# Altium PCB PCB_NanoDevKit.PcbDoc
Units mil, origin at the board's own origin, x right, y up, seen from the top; angles counter-clockwise.
Board outline 1668.62 x 2995 mil, 2 copper layers (Top Layer, Bottom Layer); 71 components, 81 nets, 304 pads, 261 vias.
Unrouted connection lines stored in the file: 6.
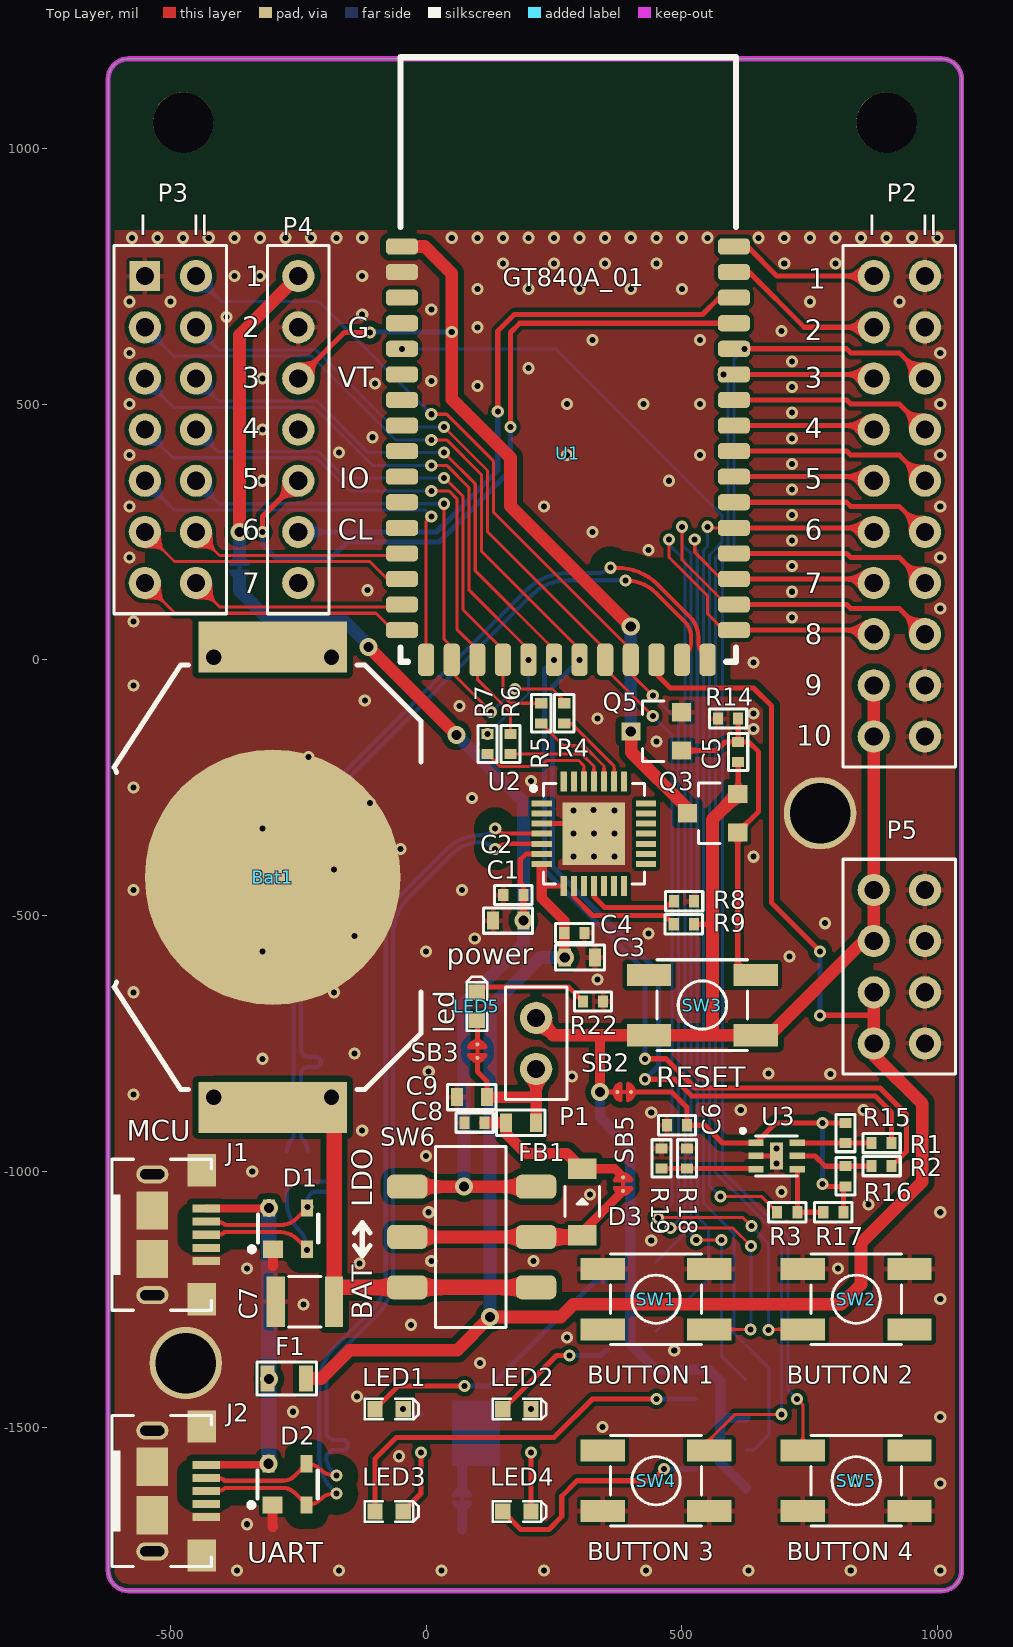
[diagram p0: Top Layer view]
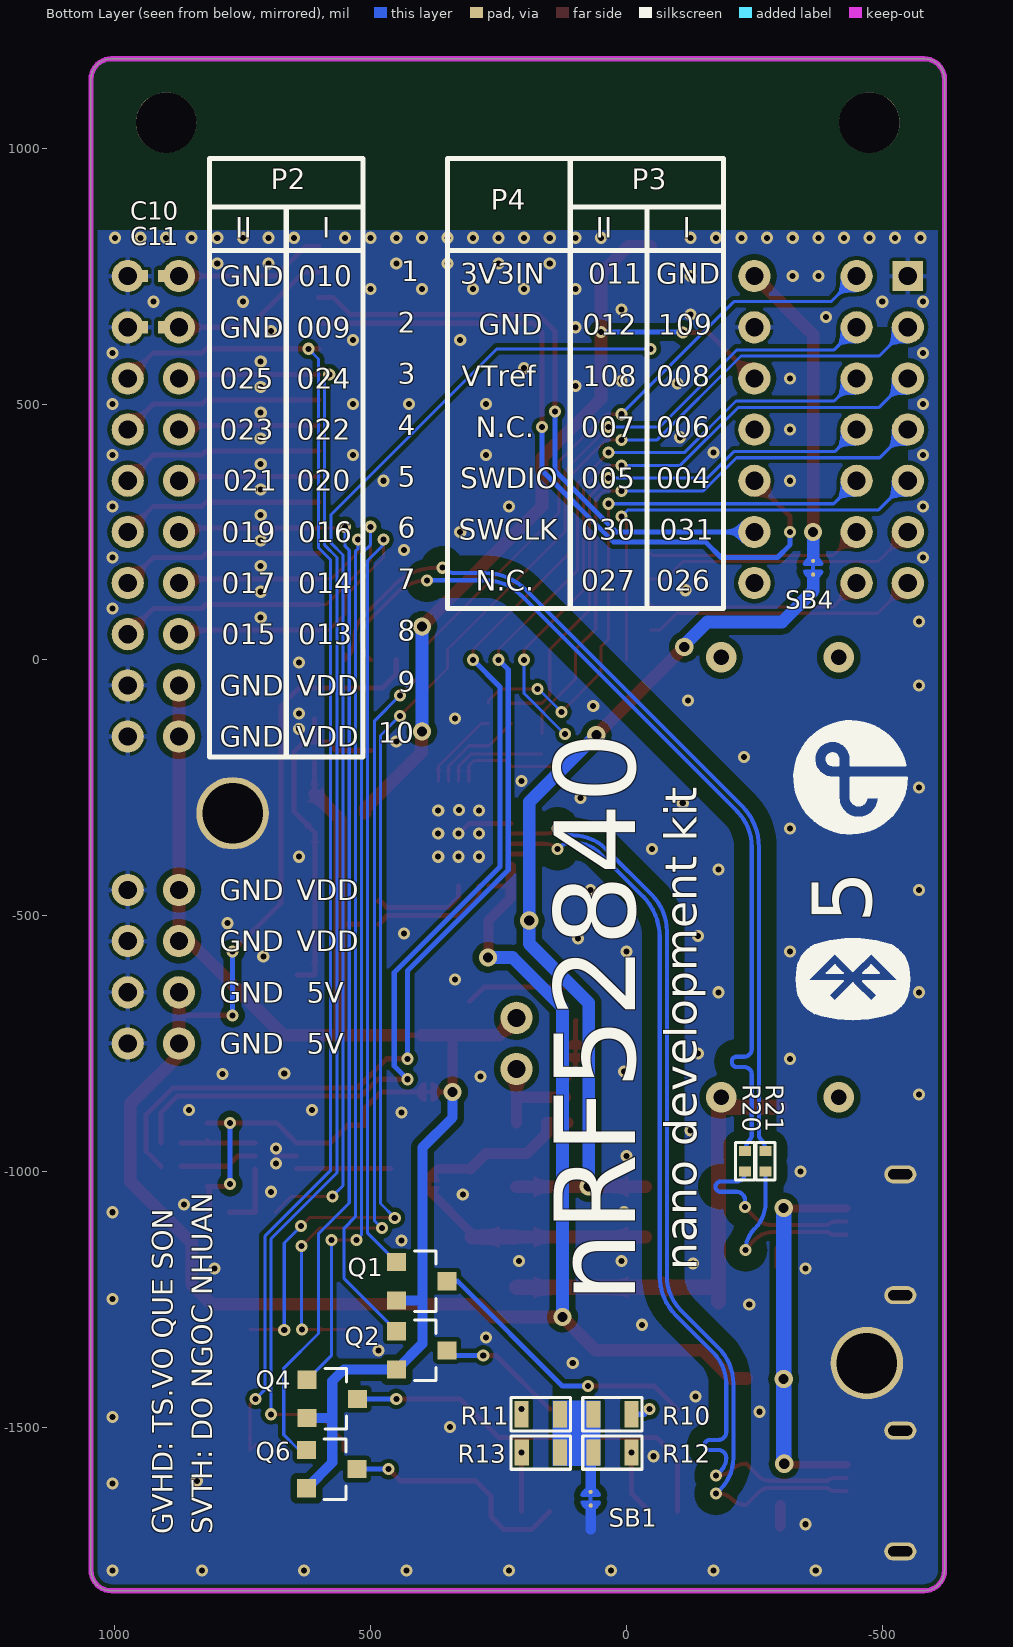
[diagram p1: Bottom Layer view, seen from below]

## Layer stack, top to bottom
Top Solder: solder mask 0.4, Solder Resist, Dk 3.5
Top Layer: signal copper 1.4
Dielectric 1: dielectric 12.6, FR-4, Dk 4.8
Bottom Layer: signal copper 1.4
Bottom Solder: solder mask 0.4, Solder Resist, Dk 3.5

## Board outline
-621.81,-1780 ccw(c-581.81,-1780) -581.81,-1820 1006.81,-1820 ccw(c1006.81,-1780) 1046.81,-1780 1046.81,1135 ccw(c1006.81,1135) 1006.81,1175 -581.81,1175 ccw(c-581.81,1135) -621.81,1135

## Design rules (kind name [scope] priority, off if disabled: settings)
Clearance SB_Clearance [HasFootprint('Solderbridge_Shorted')] p1: gap=6 ignorepadtopadclearanceinfootprint=FALSE except(12: Arc-Fill Arc-Poly Arc-Region Track-Fill Track-Poly Track-Region SMDPad-Fill SMDPad-Poly SMDPad-Region THPad-Fill THPad-Poly THPad-Region Via-Fill Via-Poly Via-Region Fill-Fill Fill-Poly Fill-Region Poly-Poly Poly-Region Region-Region)
Clearance Power [InNet('VBUS') or InNet('VBUS''') or InNet('VDD_nRF') or InNet('VTref') or InNet('VDD_SS') or InNet('VDD_SYS') or InNet('VDD_SYS''') or InNet('BAT_VDD') or InNet('LDO_VDD')  or InNet('NetC8_2') or InNet('3V3IN') vs InNet('GND')] p2: gap=10 ignorepadtopadclearanceinfootprint=FALSE except(12: Arc-Fill Arc-Poly Arc-Region Track-Fill Track-Poly Track-Region SMDPad-Fill SMDPad-Poly SMDPad-Region THPad-Fill THPad-Poly THPad-Region Via-Fill Via-Poly Via-Region Fill-Fill Fill-Poly Fill-Region Poly-Poly Poly-Region Region-Region)
Clearance "Stitching VDD_nRF" [IsStitchingVia and InNet('VDD_nRF') vs (IsVia and (Not IsStitchingVia)) Or IsPad] p3: gap=5 ignorepadtopadclearanceinfootprint=FALSE
Clearance USB_Clearance [(InDifferentialPairClass('All Differential Pairs'))] p4: gap=6 ignorepadtopadclearanceinfootprint=FALSE except(30: Arc-Fill Arc-Poly Arc-Region Track-Fill Track-Poly Track-Region SMDPad-Fill SMDPad-Poly SMDPad-Region THPad-Fill THPad-Poly THPad-Region Via-Fill Via-Poly Via-Region Fill-Fill Fill-Poly Fill-Region Poly-Poly Poly-Region Region-Region)
Clearance [All] p5: gap=6 ignorepadtopadclearanceinfootprint=FALSE except(8: Arc-Fill Arc-Poly Arc-Region Track-Fill Track-Poly Track-Region SMDPad-Fill SMDPad-Poly SMDPad-Region THPad-Fill THPad-Poly THPad-Region Via-Fill Via-Poly Via-Region Fill-Fill Fill-Poly Fill-Region Poly-Poly Poly-Region Region-Region)
DiffPairsRouting [All] p1: maxlimit=6 minlimit=6 mostfreqgap=6 toplayer_minwidth=8 toplayer_maxwidth=8 toplayer_prefwidth=8 bottomlayer_minwidth=8 bottomlayer_maxwidth=8 bottomlayer_prefwidth=8 maxuncoupledlength=500
PolygonConnect PolygonConnect_1 [HasFootprint('CR2032_HOLDER')     or HasFootprint('QFN28-CP2102')       or HasFootprint('nRF52840_GT840A01')         or HasFootprint('USB-Micro-B-RA-SMD-PiP') or HasPad('Free-1')] p1: connectstyle=Direct reliefconductorwidth=10 reliefentries=4 polygonreliefangle="90 Angle" airgapwidth=10
PolygonConnect PolygonConnect_Via [isVia and InNet('GND')] p2: connectstyle=Direct reliefconductorwidth=10 reliefentries=4 polygonreliefangle="90 Angle" airgapwidth=10
PolygonConnect [All] p3: connectstyle=Relief reliefconductorwidth=10 reliefentries=4 polygonreliefangle="90 Angle" airgapwidth=6
RoutingVias [All] p1: holewidth=15.75 width=27.56 viastyle="Through Hole" minholewidth=11.81 minwidth=23.62 maxholewidth=39.37 maxwidth=78.74
SolderMaskExpansion [All] p1: expansion=4
Width [All] p1: maxlimit=100 minlimit=6 preferedwidth=10
29 further rules are at their usual default settings.

## Classes and differential pairs
component class Sheet2_nRF52840_module: R1 R2 R3 U1
component class Sheet3_CP2102: C1 C2 C3 C4 R4 R5 R6 R7 R8 R9 U2
component class Sheet4_misc: C5 C6 LED1 LED2 LED3 LED4 Q1 Q2 Q3 Q4 Q5 Q6 R10 R11 R12 R13 R14 R15 R16 R17 R18 R19 SB1 SB2 SW1 SW2 SW3 SW4 SW5 U3
component class Sheet5_PowerSupply&Connecters: Bat1 C7 C8 C9 C10 C11 D1 D2 D3 F1 FB1 J1 J2 LED5 P1 P2 P3 P4 P5 R20 R21 R22 SB3 SB4 SB5 SW6
differential pair D1: +D1_P -D1_N
differential pair D2: +D2_P -D2_N
differential pair D3: +D3_P -D3_N

## Components (designator, comment, footprint, x,y, rotation, side; value= is the part's Value field where it differs from the comment)
Bat1 "Bat Holder CR2032" CR2032_HOLDER -300,-425 r270 top locked
C1 "4.7µF" 0603_Imperial 130.94,-510 r0 top
C2 "100nF" "0402 imperial" 150.63,-460 r0 top
C3 "1µF" 0603_Imperial 330.02,-582 r180 top
C4 "100nF" "0402 imperial" 309.35,-534 r180 top
C5 "47nF" "0402 imperial" 610,-160.63 r270 top
C6 "47nF" "0402 imperial" 470.63,-910 r0 top
C7 "100µF" 1210_Imperial -294.17,-1255 r0 top
C8 "100nF" "0402 imperial" 75,-905 r0 top
C9 "1µF" 0603_Imperial 60,-855 r0 top
C10 "Ctuning" "0402 imperial" 905.63,750 r0 bottom
C11 "Ctuning" "0402 imperial" 945,650 r180 bottom
D1 "PRTR5V0U2X" SOT190P230X110-4L -270,-1112 r90 top
D2 "PRTR5V0U2X" SOT190P230X110-4L -271,-1612 r90 top
D3 "DIODE S4" SOD-123 305,-995.08 r270 top
F1 "0.5A 6V" 0805_Imperial -310,-1405 r0 top
FB1 "470R/3A" 0603_Imperial 155.94,-905 r0 top
J1 "MicroUSB-B" USB-Micro-B-RA-SMD-PiP -430,-1124 r0 top
J2 "MicroUSB-B" USB-Micro-B-RA-SMD-PiP -430,-1625 r0 top
LED1 "Red" LED_0603 -45,-1465 r180 top
LED2 "Green" LED_0603 205,-1465 r180 top
LED3 "Yellow" LED_0603 -45,-1665 r180 top
LED4 "Blue" LED_0603 205,-1665 r180 top
LED5 "Power" LED_0603 99,-650 r270 top
P1 "2p, 2.54mm" CONN2.54MM2P 215,-800 r90 top
P2 "10x2, 2.54mm" CONN2.54MM10X2 875,750 r270 top locked
P3 "2x7p, 2.54mm" CONN2.54MM7PX2 -550,750 r270 top
P4 "Debug&Programming" CONN2.54MM7P -250,750 r270 top
P5 "2x4p, 2.54mm" CONN2.54MM2X4 875,-450 r270 top
Q1 "Si2301DS" SOT-23 400,-1215 r270 bottom
Q2 "Si2301DS" SOT-23 400,-1350 r270 bottom
Q3 "Si2301DS" SOT-23 560,-300 r90 top
Q4 "Si2301DS" SOT-23 575,-1445 r270 bottom
Q5 "Si2300" SOT-23 450,-140 r90 top
Q6 "Si2301DS" SOT-23 576.02,-1582.19 r270 bottom
R1 "0R" "0402 imperial" 910,-945 r180 top
R2 "0R" "0402 imperial" 910,-990 r180 top
R3 "0R" "0402 imperial" 686.26,-1080 r0 top
R4 "0R" "0402 imperial" 270,-85 r270 top
R5 "0R" "0402 imperial" 225,-85 r270 top
R6 "0R" "0402 imperial" 165,-145 r270 top
R7 "0R" "0402 imperial" 120,-145 r270 top
R8 "10K" "0402 imperial" 484.63,-472 r0 top
R9 "4.7K" "0402 imperial" 484,-517 r0 top
R10 "680R" 0805_Imperial -10,-1475 r0 bottom
R11 "10K" 0805_Imperial 205,-1475 r180 bottom
R12 "1K" 0805_Imperial -10,-1550 r0 bottom
R13 "1K" 0805_Imperial 204.8,-1550 r180 bottom
R14 "100K" "0402 imperial" 570.63,-115 r0 top
R15 "4K7" "0402 imperial" 820,-945 r90 top
R16 "4K7" "0402 imperial" 820,-990 r270 top
R17 "1M" "0402 imperial" 776.26,-1080 r0 top
R18 "1M" "0402 imperial" 510,-955 r270 top
R19 "1M" "0402 imperial" 460,-955 r270 top
R20 "0R" "0402 imperial" -232,-1000 r90 bottom
R21 "0R" "0402 imperial" -272,-1000 r90 bottom
R22 "15K" "0402 imperial" 346,-668 r180 top
SB1 "Solderbridge" Solderbridge_Shorted 70,-1640 r270 bottom net-tie
SB2 "Solderbridge" Solderbridge_Shorted 387,-845 r0 top net-tie
SB3 "Solderbridge" Solderbridge_Shorted 100,-765 r90 top net-tie
SB4 "Solderbridge" Solderbridge_Shorted -365,180 r90 bottom net-tie
SB5 "Solderbridge" Solderbridge_Shorted 385,-1025 r270 top net-tie
SW1 "BUTTON 1" Switch-PB-4.5x4.5mm-SMD 449.33,-1250 r180 top
SW2 "BUTTON 2" Switch-PB-4.5x4.5mm-SMD 840.67,-1250 r180 top
SW3 "RESET" Switch-PB-4.5x4.5mm-SMD 540,-675 r0 top
SW4 "BUTTON 3" Switch-PB-4.5x4.5mm-SMD 449.33,-1605 r0 top
SW5 "BUTTON 4" Switch-PB-4.5x4.5mm-SMD 840.67,-1605 r0 top
SW6 "MSS22D18" MSS22D18SMD 215,-1030 r90 top locked
U1 "nRF52840 module" nRF52840_GT840A01 0,0 r0 top locked
U2 "CP2102" QFN28-CP2102 328.03,-340 r0 top locked
U3 "Light Sensor" SON65P200X210X80-7N 685,-970 r0 top locked

## Footprints (in the part's own frame and the unit in brackets; to place one, negate y for a bottom-side part, rotate by r counter-clockwise, add the part's x,y. Pads: shape width x height; smd on the part's side, far side on the other; paste and mask are expansions set on the pad)
"0402 imperial" [mm] "R, L, C"
  rect 0.5x0.6 smd: 1(0,0) 2(1,0)
  silkscreen extent -0.43,-0.48 1.43,0.48, body extent 0,-0.25 1,0.25, height 0.35
0603_Imperial [mm]
  rect 0.6x0.9 smd: 1(0,0) 2(1.5,0)
  silkscreen extent -0.48,-0.63 1.95,0.63, body extent -0.02,-0.42 1.53,0.43, height 0.35
0805_Imperial [mm]
  rect 0.7x1.3 smd: 1(0,0) 2(1.9,0)
  silkscreen extent -0.53,-0.82 2.42,0.82, body extent -0.05,-0.6 1.95,0.6, height 0.45
1210_Imperial [mm]
  rect 0.9x2.5 smd: 1(0,0) 2(2.9,0)
  silkscreen extent 0.65,-1.25 2.25,1.25, body extent -0.15,-1.25 3.05,1.25, height 0.55
CONN2.54MM2P [mm]
  round 1.6 hole 0.9: 1(0,0) 2(2.54,0)
  silkscreen extent -1.52,-1.52 4.06,1.52, body extent -1.27,-1.27 3.81,1.27, height 8.5
CONN2.54MM2X4 [mm]
  round 1.6 hole 0.9: 1(0,0) 2(0,2.54) 3(2.54,0) 4(2.54,2.54) 5(5.08,0) 6(5.08,2.54) 7(7.62,0) 8(7.62,2.54)
  silkscreen extent -1.52,-1.52 9.14,4.06, body extent -1.27,-1.27 8.89,3.81, height 8.5
CONN2.54MM7P [mm]
  round 1.6 hole 0.9: 1(0,0) 2(2.54,0) 3(5.08,0) 4(7.62,0) 5(10.16,0) 6(12.7,0) 7(15.24,0)
  silkscreen extent -1.52,-1.52 16.76,1.52, body extent -1.27,-1.27 16.51,1.27, height 8.5
CONN2.54MM7PX2 [mm]
  rect 1.5x1.5 hole 0.9: 1(0,0)
  round 1.6 hole 0.9: 2(0,2.54) 3(2.54,0) 4(2.54,2.54) 5(5.08,0) 6(5.08,2.54) 7(7.62,0) 8(7.62,2.54) 9(10.16,0) 10(10.16,2.54) 11(12.7,0) 12(12.7,2.54) 13(15.24,0) 14(15.24,2.54)
  silkscreen extent -1.52,-1.52 16.76,4.06, body extent -1.27,-1.27 16.51,3.81, height 8.5
CONN2.54MM10X2 [mm]
  round 1.6 hole 0.9: 1(0,0) 2(0,2.54) 3(2.54,0) 4(2.54,2.54) 5(5.08,0) 6(5.08,2.54) 7(7.62,0) 8(7.62,2.54) 9(10.16,0) 10(10.16,2.54) 11(12.7,0) 12(12.7,2.54) 13(15.24,0) 14(15.24,2.54) 15(17.78,0) 16(17.78,2.54) 17(20.32,0) 18(20.32,2.54) 19(22.86,0) 20(22.86,2.54)
  silkscreen extent -1.52,-1.52 24.38,4.06, body extent -1.27,-1.27 24.13,3.81, height 8.5
CR2032_HOLDER [mil] "BK-912 @ tme"
  rect 100x290 smd: 1(-450,0) 1(450,0)
  round 500 smd: 2(0,0)
  silkscreen extent -415,-310 415,290, body extent -455,-310 455,290, height 170
LED_0603 [mil]
  rect 30x32 smd: 1(0,0) 2(55,0)
  silkscreen extent -30,-20 75,20, body extent -4,-16 60,16, height 24
MSS22D18SMD [mm]
  rrect50% 1.2x2 smd: 1(0,0) 2(-2.5,0) 3(-5,0) 4(0,6.4) 5(-2.5,6.4) 6(-5,6.4)
  silkscreen extent -7,1.5 2,5, body extent -6.75,0.1 1.75,6.35, height 3.5
nRF52840_GT840A01 [mm] "mechanical 31 tolerance 0.75mm"
  rrect50% 1.6x0.8 smd: 1(-1.203,20.522) 2(-1.203,19.252) 3(-1.203,17.982) 4(-1.203,16.712) 5(-1.203,15.442) 6(-1.203,14.172) 7(-1.203,12.902) 8(-1.203,11.632) 9(-1.203,10.362) 10(-1.203,9.092) 11(-1.203,7.822) 12(-1.203,6.552) 13(-1.203,5.282) 14(-1.203,4.012) 15(-1.203,2.742) 16(-1.203,1.472) 29(15.282,1.472) 30(15.282,2.742) 31(15.282,4.012) 32(15.282,5.282) 33(15.282,6.552) 34(15.282,7.822) 35(15.282,9.092) 36(15.282,10.362) 37(15.282,11.632) 38(15.282,12.902) 39(15.282,14.172) 40(15.282,15.442) 41(15.282,16.712) 42(15.282,17.982) 43(15.282,19.252) 44(15.282,20.522)
  rrect50% 0.8x1.6 smd: 17(0,0) 18(1.27,0) 19(2.54,0) 20(3.81,0) 21(5.08,0) 22(6.35,0) 23(7.62,0) 24(8.89,0) 25(10.16,0) 26(11.43,0) 27(12.7,0) 28(13.97,0)
  silkscreen extent -1.28,-0.1 15.38,29.92, body extent -1.28,-0.1 15.28,29.92, height 2
QFN28-CP2102 [mm] "Silicon Labs"
  rect 1x0.3 smd: 1(-2.59,1.5) 2(-2.59,1) 3(-2.59,0.5) 4(-2.59,0) 5(-2.59,-0.5) 6(-2.59,-1) 7(-2.59,-1.5) 15(2.59,-1.5) 16(2.59,-1) 17(2.59,-0.5) 18(2.59,0) 19(2.59,0.5) 20(2.59,1) 21(2.59,1.5)
  rect 0.3x1 smd: 8(-1.5,-2.59) 9(-1,-2.59) 10(-0.5,-2.59) 11(0,-2.59) 12(0.5,-2.59) 13(1,-2.59) 14(1.5,-2.59) 22(1.5,2.59) 23(1,2.59) 24(0.5,2.59) 25(0,2.59) 26(-0.5,2.59) 27(-1,2.59) 28(-1.5,2.59)
  rect 3.1x3.1 smd: 29(0,0)
  silkscreen extent -3.1,-2.5 2.5,2.5, body extent -2.5,-2.5 2.5,2.5, height 1
SOD-123 [mm]
  rect 1x1.4 smd: 1(0,0) 2(3.3,0)
  silkscreen extent 0.87,-0.85 2.37,0.85, body extent 0.23,-0.85 3.08,0.85, height 1.35
Solderbridge_Shorted [mm]
  round 0.2 smd paste-10: 1(-0.338,0) 2(0.338,0)
  Top Layer region: -0.102,-0.432 -0.178,-0.505 -0.296,-0.467 -0.361,-0.424 -0.434,-0.351 -0.488,-0.292 -0.546,-0.193 -0.574,-0.099 -0.569,0.122 -0.544,0.193 -0.46,0.33 -0.376,0.411 -0.284,0.469 -0.183,0.5 -0.132,0.483 -0.102,0.43
  Top Layer region: 0.102,0.432 0.178,0.505 0.296,0.467 0.361,0.424 0.434,0.351 0.488,0.292 0.546,0.193 0.574,0.099 0.569,-0.122 0.544,-0.193 0.46,-0.33 0.376,-0.411 0.284,-0.469 0.183,-0.5 0.132,-0.483 0.102,-0.43
  Top Layer lines w0.152: 0.178,0.431 cw(c0.068,0) 0.178,-0.431 ; -0.178,0.431 ccw(c-0.068,0) -0.178,-0.431
  Top Layer lines w0.203: 0.338,0 -0.338,0
SON65P200X210X80-7N [mm]
  rect 0.76x0.32 smd: 1(-1.02,0.65) 2(-1.02,0) 3(-1.02,-0.65) 4(1.02,-0.65) 5(1.02,0) 6(1.02,0.65)
  rect 0.65x1.35 smd: 7(0,0)
  silkscreen extent -1.77,-1 1.05,1.35, body extent -1.05,-1 1.05,1, height 0.75
SOT190P230X110-4L [mm]
  rect 0.85x1 smd: 1(-1.025,0.75)
  rect 0.85x0.6 smd: 2(-1.025,-0.95) 3(1.025,-0.95) 4(1.025,0.95)
  silkscreen extent -1.15,-1.5 0.7,1.92, body extent -1.21,-1.46 1.21,1.46, height 1
SOT-23 [mm] "1-G 2-S 3-D"
  rect 0.9x0.95 smd: 1(-0.95,-1.25) 2(0.95,-1.25) 3(0,1.25)
  silkscreen extent -1.51,-0.38 1.5,0.69, body extent -1.52,-1.23 1.48,1.27, height 1.06
Switch-PB-4.5x4.5mm-SMD [mm] "Tactile Switch, SPNO, SMD, 4.5x4.5x3.8mm"
  rect 2.2x1.1 smd: 1(-2.65,-1.5) 1(2.65,-1.5) 2(-2.65,1.5) 2(2.65,1.5)
  silkscreen extent -2.25,-2.25 2.25,2.25, body extent -2.25,-2.25 2.25,2.25, height 3.8
USB-Micro-B-RA-SMD-PiP [mm]
  rect 1.35x0.4 smd: 1(0,1.3) 2(0,0.65) 3(0,0) 4(0,-0.65) 5(0,-1.3)
  oval 1.6x0.9 hole 0.5 slot 1.2 at 0 deg: 6(-2.675,-3) 6(-2.675,3)
  rect 1.55x1.9 smd: 6(-2.675,-1.2) 6(-2.675,1.2)
  rect 1.4x1.6 smd: 6(-0.225,-3.2) 6(-0.225,3.2)
  silkscreen extent -4.75,-3.75 0.25,3.75, body extent -5.28,-4.1 0.15,4.1, height 2.72

## Part data
Bat1: "Bat Holder CR2032 SMD", Note="Bat Holder CR2032"
C1 C2 C3 C4 C5 C6 C7 C8 C9 C10 C11: library part Capacitor, "Genaral Schematic", Tolerance=±5%
D1 D2: "Ultra low capacitance double rail-to-rail ESD protection diode", 2nd source part number=152-4157, Manufacturer=NXP, Supplier part number=568-4140-1-ND, 2nd source Supplier=Farnell, Artikkelnr Noca=10069015, Artikkelnr Simpro=N.A., Datasheet=http://www.farnell.com/datasheets/109718.pdf, Footprint Doc=SOT-143B, LatestRevisionDate=2012-06-11, Manufacturer Part Number=PRTR5V0U2X, Part Number=PRTR5V0U2X, Published=2012-06-11, Publisher="Nordic Semiconductor", Supplier=Digi-Key
D3: library part "Diode Schottky", "Diode Schottky"
F1: library part Fuse, "Fuse Fuse Fuse"
FB1: library part "Ferrite Bead", "General FB"
J1 J2: "MicroUSB-B-SMT", 2nd source part number=609-4616-1-ND, Manufacturer="Allen Creations Corp.", Manufacturer Part Number=AJU55-BS2111-L, Part Number=USB-Micro-B-RA-SMD-PiP, Part number IPS=00000007790, 2nd source Supplier=Digi-Key, Artikkelnr Noca=55029020, Artikkelnr Simpro=N.A., Datasheet="\\hizz\pro\app9717\Datasheet\connectores\Allen Creations Corp\AJU-211.pdf", Footprint Doc=USB-Micro-B-RA-SMD-PiP, LatestRevisionDate=2016-04-21, Pin Count=5, Published=2014-10-07, Publisher="Nordic Semiconductor", Supplier=Cabcon, Supplier part number=AJU55-BS2111-L
LED1 LED2 LED3 LED4: library part LED, "General Schematic"
  LED1: Color=Red
  LED2: Color=Green
  LED3: Color=Yellow
  LED4: Color=Blue
LED5: library part LED, "General Schematic", Color=Green, Indicate=Power
P1: library part "Headerx 2"
P2: library part "Header 10x2", "General Schematic"
P3: library part "Header 7x2", "General Schematic"
P4: library part "Header 7", "General Schematic"
P5: library part "Header 4x2", "General Schematic"
Q1 Q2 Q3 Q4 Q6: library part MOS-P, "SOT-23 1-G 2-S 3-D"
Q5: library part MOS-N, "SOT-23 1-G 2-S 3-D"
R1 R2 R3 R4 R5 R6 R7 R8 R9 R10 R11 R12 R13 R14 R15 R16 R17 R20 R21 R22: library part Resistor, "General Schematic", Tolerance=±5%
R18 R19: library part Resistor, "General Schematic", Tolerance=±1%, Link of Supplier=http://thegioiic.com/products/dien-tro-510k-ohm-0402-1, Supplier=thegioiic
SB1 SB2 SB3 SB4 SB5: "Shorted Solderbridge", Part Number="Solderbridge Shorted", Artikkelnr Noca=N.A., Artikkelnr Simpro=N.A., Footprint Doc=Solderbridge_Shorted, LatestRevisionDate=2012-08-07, Pin Count=2, Published=2012-08-07, Publisher="Nordic Semiconductor"
SW1 SW2 SW3 SW4 SW5: "Push Button", Pin Count=4
SW6: "Slide Switch DPDT", Pin Count=6
U1: library part nRF52840_GT840A01, "nRF52840 module GT840A_01"
U2: "Silicon Labs"
U3: library part ISL29023IROZ-T7, "Light Sensor, 2.1x2mm", Manufacturer=Intersil, Manufacturer Partnumber=ISL29023IROZ-T7, Type Sensor="Light Sensor"

## Free pads (board coordinates)
  round 118.11 hole 118.11: 1(-475,1050) 1(900,1050)
  round 141.73 hole 118.11: 1(-470,-1375) 1(770,-300)

## Via types
v1: diameter 23.62, hole 11.81, Top Layer to Bottom Layer, tented both sides, 244 vias
v2: diameter 35.43, hole 19.68, Top Layer to Bottom Layer, tented both sides, 13 vias
v3: diameter 60, hole 30, Top Layer to Bottom Layer, tented top, 4 vias

## Nets (pads, with @x,y where several pads share a name; then routed paths per layer and width w, separated by ;. In a path a pad name is that pad's centre, name@x,y a point inside that pad or via, vN(x,y) a via of type N, cw(c..) or ccw(c..) an arc to the next point about the centre after c; other vN are vias at no path point)
3V3IN: P4.1 SB4.2 | length 595.1
  Top Layer w25: v2(-365,250) -365,635 P4.1
  Bottom Layer w25: -365,202.5 v2(-365,250)
BAT_VDD: Bat1.1 C7.2 SW6.3 SW6.6 | length 895
  Top Layer w30: Bat1.1@-300,-875 -180,-875 C7.2@-180,-1226.85 ; C7.2 C7.2@-180,-1226.85 ; SW6.3 SW6.6 C7.2@-180,-1226.85
  other v3: -415,-855 -185,-855 -415,5 -185,5
D1_N: D1.3 J1.2 R20.1 | length 373.8
  Top Layer w8: J1.2 -408.75,-1098.41 cw(c-408.75,-1120.91) -392.83,-1105 -285,-1105 ccw(c-285,-1059.02) -252.48,-1091.53 D1.3
  Bottom Layer w8: v1(-232,-1070) -232,-1057 cw(c-215,-1057) -215,-1040 -184,-1040 ccw(c-184,-1030) -174,-1030 ccw(c-184,-1030) -184,-1020 -215,-1020 cw(c-215,-1003) -232,-1003 R20.1
D1_P: D1.2 J1.3 R21.1 | length 375.2
  Top Layer w8: J1.3 -406.5,-1124 ccw(c-406.5,-1106.93) -394.43,-1119 -285,-1119 cw(c-285,-1164.98) -252.48,-1132.47 D1.2
  Bottom Layer w8: R21.1 -272,-1061.3 ccw(c-200.3,-1061.3) -251,-1112 -249.97,-1113.03 cw(c-290.94,-1154) v1(-233,-1154)
D2_N: R20.2 U1.27 | length 1750.3
  Top Layer w8: v1(390,155) cw(c390,70.5) 449.75,130.25 505,75 cw(c473.62,43.62) 518,43.62 518,37.8 cw(c470.2,37.8) 504,4 U1.27
  Bottom Layer w8: R20.2 ccw(c-265.42,-960.63) -241.79,-937 cw(c-234.03,-929.25) -245,-929.25 -245,-811 cw(c-230,-811) -230,-796 -215,-796 ccw(c-215,-787) -206,-787 -206,-785 ccw(c-215,-785) -215,-776 -230,-776 cw(c-230,-761) -245,-761 -245,-366.42 cw(c-145,-366.42) -215.71,-295.71 206.21,126.21 cw(c276.92,55.5) 276.92,155.5 v1@390,155.5
D2_P: R21.2 U1.28 | length 1753.6
  Top Layer w8: v1(360,180) 372.58,180 cw(c372.58,66) 453.13,146.67 cw(c372.58,66) 453.19,146.61 514.9,84.9 cw(c473.62,43.62) 532,43.62 532,37.8 ccw(c579.8,37.8) 546,4 U1.28 U1.28@550,10.04
  Bottom Layer w8: R21.2 cw(c-238.58,-960.63) -262.21,-937 ccw(c-269.97,-929.25) -259,-929.25 -259,-366.42 cw(c-145,-366.42) -225.61,-285.81 196.31,136.11 cw(c276.92,55.5) 276.92,169.5 334.65,169.5 ccw(c334.65,205.35) v1(360,180)
D3_N: D2.3 J2.2 U2.5 | length 1836.3
  Top Layer w8: J2.2 -407.33,-1599.41 cw(c-407.33,-1618.5) -393.83,-1605 -280,-1605 ccw(c-280,-1573.5) -257.73,-1595.77 D2.3 cw(c-233.6,-1609.82) -206.61,-1582.83 ccw(c-177.22,-1553.43) -177.22,-1595 v1(-175,-1595) ; v1(135,-370) cw(c159.9,-394.9) 159.9,-359.68 U2.5
  Bottom Layer w8: v1(-175,-1595) -184.39,-1585.61 cw(c-158.79,-1560) -195,-1560 cw(c-180,-1560) -180,-1545 -163,-1545 ccw(c-163,-1535) -153,-1535 ccw(c-163,-1535) -163,-1525 -180,-1525 cw(c-180,-1510) -195,-1510 -195,-1415.36 cw(c-109.64,-1415.36) -170,-1355 -165.5,-1350.5 -139.5,-1324.5 -96.82,-1281.82 ccw(c-173.64,-1205) -65,-1205 -65,-542.22 cw(c49,-542.22) -31.67,-461.67 cw(c49,-542.22) -31.61,-461.61 50.37,-379.63 cw(c105,-434.25) 105,-357 cw(c105,-398.04) 134.02,-369.02 v1(135,-370)
D3_P: D2.2 J2.3 U2.4 | length 1835.4
  Top Layer w8: J2.3 -407.91,-1625 ccw(c-407.91,-1604.51) -393.43,-1619 -280,-1619 cw(c-280,-1650.5) -257.73,-1628.23 D2.2 ccw(c-233.6,-1614.18) -206.61,-1641.17 cw(c-179.63,-1668.15) -179.63,-1630 v1(-175,-1630) ; v1(135,-330) ccw(c159.14,-305.86) 159.14,-340 U2.4
  Bottom Layer w8: v1(-175,-1630) -183.54,-1621.46 cw(c-122.09,-1560) -209,-1560 -209,-1415.36 cw(c-109.64,-1415.36) -179.9,-1345.1 -106.72,-1271.92 ccw(c-173.64,-1205) -79,-1205 -79,-530.62 cw(c21,-530.62) -49.71,-459.91 40.47,-369.73 cw(c105,-434.25) 105,-343 ccw(c105,-301.96) 134.02,-330.98 v1(135,-330)
GND: Bat1.2 C1.1 C2.1 C3.1 C4.1 C6.1 C7.1 C8.1 C9.1 C10.2 C11.1 D1.1 D2.1 J1.5 J1.6 J2.5 J2.6 P2.2 P2.4 P2.18 P2.20 P3.1 P4.2 P5.2 P5.4 P5.6 P5.8 pad.1@770,-300 pad.1@-470,-1375 Q5.2 R8.2 R14.1 R18.1 R19.1 R22.1 SB1.2 SW1.1 SW2.1 SW4.1 SW5.1 U1.2 U2.3 U2.29 U3.2 U3.7 | length 272.7
  Top Layer w10: U2.3 308.35,-320.31 v1(328.03,-340) ; U3.2 U3.7
  Top Layer w20: D2.1 -300.53,-1694.47 -300,-1695 ; -300,-1185 -299.53,-1184.53 D1.1
  Bottom Layer w20: 70,-1700 SB1.2
  other v1: -370,-1780 -170,-1780 30,-1780 230,-1780 430,-1780 630,-1780 830,-1780 1005,-1780 -350,-1690 1005,-1610 840,-1605 -53,-1557 345,-1500 1005,-1480 -260,-1470 -135,-1440 105,-1375 485,-1350 275,-1325 -30,-1300 -240,-1260 1005,-1250 -350,-1190 805,-1190 -130,-1180 10,-1175 210,-1175 440,-1135 5,-1080 1005,-1080 865,-1065 320,-1045 695,-1040 -340,-1000 685,-985 0,-970 685,-955 -125,-920 440,-885 615,-880 855,-880 -571.97,-850 285,-815 790,-810 669,-809 5,-805 -320,-780 -140,-770 -571.97,-650 -180,-650 335,-625 710,-580 -320,-570 0,-570 95,-545 -140,-540 435,-535 780,-515 -571.97,-450 70,-450 -180,-410 288.03,-385 328.03,-385 368.03,-385 640,-385 -50,-370 288.03,-340 368.03,-340 -320,-330 288.03,-295 368.03,-295 327,-294 -110,-280 90,-270 -571.97,-250 205,-237 -230,-190 450,-160 640,-135 335,-115 640,-105 65,-90 -120,-80 -571.97,-50 640,-5 -571.97,75 715,83 1005,100 715,133 -115,136 715,183 -580,200 1005,200 435,215 715,233 325,250 715,283 -580,300 230,300 1005,300 715,333 -320,350 475,350 715,383 -580,400 275,400 535,400 1005,400 -170,405 715,433 -105,435 -320,450 715,483 -580,500 275,500 425,500 535,500 1005,500 715,533 100,535 -100,540 10,545 -320,550 200,570 715,583 -580,600 1005,600 325,625 535,625 695,643 100,650 -390,670 -125,675 10,685 -580,700 -500,700 750,700 925,700 100,725 200,725 300,725 400,725 500,725 -375,750 -325,750 -125,750 150,775 250,775 350,775 450,775 700,775 800,775 -575,825 -525,825 -475,825 -425,825 -375,825 -325,825 -275,825 -225,825 -175,825 -125,825 50,825 100,825 150,825 200,825 250,825 300,825 350,825 400,825 450,825 500,825 550,825 650,825 700,825 750,825 800,825 850,825 900,825 950,825 1000,825
LDO_VDD: C1.2 C2.2 SB4.1 SW6.1 SW6.4 U2.6 | length 1974
  Top Layer w10: C2.2 190,-441 184,-435 184,-391 195.63,-379.37 U2.6
  Top Layer w15: v2(190,-510) C2.2
  Top Layer w20: SW6.4 SW6.4@-35.97,-1031
  Top Layer w25: v2(-113,25) v2(59,-147) ; SW6.4 v2(73.78,-1030) SW6.1
  Bottom Layer w25: -365,157.05 -365,135 -304,74 -158,74 v2@-109,25 ; v2(59,-147) 190,-278 v2(190,-510) 190,-555 73.78,-671.22 v2(73.78,-1030)
NetC5_1: C5.1 Q3.1 Q5.1 R14.2 SW3.2 | length 699.3
  Top Layer w10: Q5.1 567.6,-177.4 584.37,-160.63 C5.1 ; R14.2 C5.1 ; SW3.2@644.33,-615.94 609.21,-615.94 Q3.1 650,-296.61 650,-180 630.63,-160.63 C5.1
NetC8_2: C8.2 D3.1 FB1.1 SB5.1 | length 327.1
  Top Layer w18: D3.1 368.38,-995.08 SB5.1
  Top Layer w22: C8.2 FB1.1 155.94,-925.94 195,-965 274.92,-965 D3.1
NetD3_2: D3.2 SB5.2 SW6.2 SW6.5 | length 463.2
  Top Layer w18: D3.2@301.57,-1128.43 301.57,-1121.73 SB5.2
  Top Layer w25: SW6.5 SW6.2
  Top Layer w30: SW6.2 D3.2@301.57,-1128.43
NetLED1_1: LED1.1 R10.1 | length 39.1
  Bottom Layer w10: v1(-45,-1465) -35,-1475 R10.1
NetLED1_2: LED1.2 Q1.3 | length 554.3
  Top Layer w10: LED1.2 -55,-1420 v1(75,-1420)
  Bottom Layer w10: v1(75,-1420) 125,-1420 330,-1215 Q1.3
NetLED2_1: LED2.1 R11.1
  other v1: 205,-1465
NetLED2_2: LED2.2 Q2.3 | length 253.4
  Top Layer w10: LED2.2 255,-1360 v1(280,-1360)
  Bottom Layer w10: v1(280,-1360) 340.79,-1360 Q2.3 Q2.3@355.79,-1350
NetLED3_1: LED3.1 R12.1 | length 129.5
  Top Layer w10: LED3.1 -10,-1630 v1(-10,-1550)
NetLED3_2: LED3.2 Q4.3 | length 777.3
  Top Layer w10: LED3.2 -100,-1562 -58,-1520 250,-1520 325,-1445 v1(450,-1445)
  Bottom Layer w10: v1(450,-1445) Q4.3
NetLED4_1: LED4.1 R13.1 | length 115
  Top Layer w10: LED4.1 v1(205,-1550)
NetLED4_2: LED4.2 Q6.3 | length 463.5
  Top Layer w10: LED4.2 185,-1700 240,-1700 265,-1675 265,-1635 295,-1605 442.19,-1605 v1(465,-1582.19)
  Bottom Layer w10: v1(465,-1582.19) Q6.3
NetLED5_1: LED5.1 R22.2 | length 223.4
  Top Layer w10: LED5.1 109,-640 278.63,-640 R22.2
NetLED5_2: LED5.2 SB3.2 | length 47.1
  Top Layer w10: LED5.2 100,-706 SB3.2
NetR1_2: R1.2 R15.1 U3.6 | length 152
  Top Layer w10: U3.6 R15.1@815.59,-944.41 ; R15.1@820,-940 R15.1@815.59,-944.41 ; R1.2 R15.1 819.41,-944.41 R15.1@815.59,-944.41
NetR2_2: R2.2 R16.1 U3.5 | length 153.8
  Top Layer w10: U3.5 760,-970 780,-990 R16.1 R2.2
NetR3_2: R3.2 R17.1 U3.4 | length 135.2
  Top Layer w10: U3.4 725.63,-996.06 R3.2 R17.1
NetR4_2: R4.2 U2.23 | length 161.8
  Top Layer w6: R4.2 283.37,-124.37 367.4,-208.4 U2.23
NetR5_2: R5.2 U2.24 | length 187.6
  Top Layer w6: R5.2 268.63,-168 308,-168 347.72,-207.72 U2.24
NetR6_2: R6.2 U2.25 | length 202.8
  Top Layer w6: R6.2 304.37,-184.37 328.03,-208.03 U2.25
NetR7_2: R7.2 U2.26 | length 238.5
  Top Layer w6: R7.2 144.63,-209 224,-209 236,-197 298,-197 308.35,-207.35 U2.26
NetR8_1: R8.1 U2.11 | length 193.2
  Top Layer w10: U2.11 328.03,-463.43 348.6,-484 468.63,-484 482.63,-470 R8.1
NetR9_1: R9.1 U2.9 | length 239
  Top Layer w10: U2.9 288.66,-463.43 325.23,-500 467,-500 R9.1
NetR10_2: R10.2 R11.2 R12.2 R13.2 SB1.1 | length 78.9
  Bottom Layer w20: R12.2 70,-1555.2 SB1.1
NetR18_2: R18.2 R19.2 U3.3 | length 185.3
  Top Layer w10: R19.2 R18.2 643.62,-994.37 U3.3
P0.02: U1.10
P0.03: U1.9
P0.04: P3.9 U1.17 | length 873.1
  Top Layer w6: U1.17 0,270 v1(10,280)
  Bottom Layer w6: P3.9 -493,293 -3,293 v1(10,280)
P0.05: P3.10 R4.1 U1.18 | length 1124.9
  Top Layer w6: v1(35,305) 35,40 50,25 U1.18 50,-25 v1(127,-102) ; v1(174,-57) 247,-57 270,-80 R4.1
  Bottom Layer w6: P3.10 -405,305 v1(35,305) ; v1(127,-102) 172,-57 v1(174,-57)
P0.06: P3.7 R6.1 U1.19 | length 1169.4
  Top Layer w6: v1(10,330) 45,330 60,315 60,60 100,20 U1.19 100,-38 165,-103 R6.1
  Bottom Layer w6: P3.7 -495,395 -215,395 -150,330 v1(10,330)
P0.07: P3.8 R5.1 U1.20 | length 1079.4
  Top Layer w6: v1(35,355) 36.97,355 72,319.97 72,98 150,20 U1.20 150,-70 165,-85 R5.1
  Bottom Layer w6: P3.8 -407,407 -210.03,407 -158.03,355 v1(35,355)
P0.08: P3.5 R7.1 U1.21 | length 1285.4
  Top Layer w6: v1(10,380) 40,380 84,336 84,136 200,20 v1(200,0)
  Bottom Layer w6: P3.5 -493,493 -218,493 -105,380 v1(10,380) ; v1(120,-145) 121,-145 200,-66 v1(200,0)
P0.09: C11.2 P2.3 U1.43 | length 318.1
  Top Layer w10: U1.43 631.06,757.94 739,650 P2.3
P0.10: C10.1 P2.1 U1.44 | length 297.4
  Top Layer w10: U1.44 628.06,807.94 686,750 P2.1
P0.11: P3.2 SW1.2 U1.25 | length 2815.7
  Top Layer w6: v1(10,480) 40,480 132,388 132,288 400,20 U1.25 400,-27 v1(443,-70) ; v1(478,-1111) 600,-1111 v1(635,-1146) ; SW1.2@539.94,-1309.06 553.66,-1309.06 v1(634,-1309) v1(634,-1309)
  Bottom Layer w6: P3.2 -400,700 -210,700 v1(10,480) ; v1(443,-70) 493,-120 493,-1096 v1(478,-1111) ; v1(634,-1309) 635,-1308 v1(635,-1146)
P0.12: P3.4 SW2.2 U1.24 | length 2792.9
  Top Layer w6: v1(35,455) 120,370 120,250 350,20 U1.24 350,-17 v1(443,-110) ; v1(453,-1091) 453.81,-1090.19 619.19,-1090.19 v1(636,-1107) ; v1(669,-1310) v1@668.06,-1309.06 ; SW2.2@736.34,-1309.06 v1@668.06,-1309.06 ; v1@668.06,-1309.06 664.06,-1309.06 664,-1309 668,-1309 v1@668.06,-1309.06
  Bottom Layer w6: P3.4 -406,606 -216,606 -65,455 v1(35,455) ; v1(443,-110) 481,-148 481,-1063 v1(453,-1091) ; v1(636,-1107) 669,-1140 v1(669,-1310)
P0.13: P2.15 Q1.1 U1.29 | length 1966.6
  Top Layer w6: v1(475,235) 475,200 550,125 550,90 582.06,57.94 U1.29
  Top Layer w10: U1.29 867.06,57.94 P2.15
  Bottom Layer w6: Q1.1 506,-1120.81 506,194 475,225 v1(475,235)
P0.14: P2.13 Q2.1 U1.31 | length 2001.2
  Top Layer w6: v1(525,235) 525,210 577.06,157.94 U1.31
  Top Layer w10: U1.31 867.06,157.94 P2.13
  Bottom Layer w6: Q2.1 552,-1209.81 552,-1111 530,-1089 530,211.97 525,216.97 v1(525,235)
P0.15: P2.16 Q4.1 U1.30 | length 2347.8
  Top Layer w6: v1(500,260) 500,195 587.06,107.94 U1.30 ; v1(528,-1134) v1(577,-1134)
  Top Layer w10: U1.30 822.06,107.94 830,100 925,100 P2.16
  Bottom Layer w6: v1(500,260) 500,225 518,207 518,-1124 v1(528,-1134) ; v1(577,-1134) 577,-1360.39 Q4.1
P0.16: P2.11 Q6.1 U1.33 | length 2217.6
  Top Layer w6: v1(550,260) 552.06,257.94 U1.33
  Top Layer w10: U1.33 867.06,257.94 P2.11
  Bottom Layer w6: v1(550,260) 550,222 542,214 542,-1062 602,-1122 602,-1317 670,-1385 670,-1515 640.21,-1544.79 Q6.1
P0.17: P2.14 U1.32 | length 397.4
  Top Layer w10: U1.32 822.06,207.94 830,200 925,200 P2.14
P0.19: P2.12 U1.34 | length 397.4
  Top Layer w10: U1.34 822.06,307.94 830,300 925,300 P2.12
P0.20: P2.9 U1.35 | length 276.6
  Top Layer w10: U1.35 867.06,357.94 P2.9
P0.21: P2.10 U1.36 | length 397.4
  Top Layer w10: U1.36 822.06,407.94 830,400 925,400 P2.10
P0.22: P2.7 U1.37 | length 276.6
  Top Layer w10: U1.37 867.06,457.94 P2.7
P0.23: P2.8 U1.38 | length 397.4
  Top Layer w10: U1.38 822.06,507.94 830,500 925,500 P2.8
P0.24: P2.5 SW4.2 U1.39 | length 2559.5
  Top Layer w6: SW4.2@553.66,-1545.94 553.66,-1525.34 604,-1475 v1(695,-1475)
  Top Layer w10: U1.39 867.06,557.94 P2.5
  Bottom Layer w6: v1(581,558) 590,549 590,224.03 566,200.03 566,-1003 695,-1132 v1(695,-1475)
P0.25: P2.6 SW5.2 U1.40 | length 2651.7
  Top Layer w6: SW5.2@724,-1533.61 736.34,-1545.94 736.34,-1456.34 v1(725,-1445)
  Top Layer w10: U1.40 822.06,607.94 830,600 925,600 P2.6
  Bottom Layer w6: v1(622,608) 602,588 602,219.06 579,196.06 579,-999.03 707,-1127.03 707,-1427 v1(725,-1445)
P0.26: P3.13 U1.16 | length 540.8
  Top Layer w6: P3.13 -491,91 -98,91 -64.94,57.94 U1.16
P0.27: P3.14 U1.15 | length 424.2
  Top Layer w6: P3.14 -403,103 -52.3,103 U1.15
P0.28: U1.11
P0.29: U1.12
P0.30: P3.12 U1.13 | length 423.3
  Top Layer w6: P3.12 -404,204 -51.3,204 U1.13
P0.31: P3.11 U1.14 | length 540.8
  Top Layer w6: P3.11 -492,192 -110,192 -75.94,157.94 U1.14
P1.08: P3.6 R2.1 U1.22 | length 2577.7
  Top Layer w6: v1(35,405) 96,344 96,174 250,20 v1(250,0)
  Top Layer w10: v1(428,-780) 468.63,-780 525.63,-837 887,-837 939,-889 939,-961 R2.1
  Bottom Layer w6: P3.6 -406,506 -214.03,506 -113.03,405 v1(35,405)
  Bottom Layer w10: v1(250,0) 231,-19 231,-411 428,-608 v1(428,-780)
P1.09: P3.3 R1.1 U1.23 | length 2729.2
  Top Layer w6: v1(10,430) 40,430 108,362 108,212 300,20 v1(300,0)
  Top Layer w10: v1(428,-820) 486,-820 519,-853 878,-853 910,-885 R1.1
  Bottom Layer w6: P3.3 -494,594 -224,594 -60,430 v1(10,430)
  Bottom Layer w10: v1(300,0) 247,-53 247,-404.37 454,-611.37 454,-794 v1(428,-820) v1@425,-820
P1.10: U1.3
P1.11: U1.4
P1.12: R3.1 U1.5 | length 2234.7
  Top Layer w6: v1(575,-1049) 655.26,-1049 R3.1
  Bottom Layer w6: v1(-47.35,607.94) 253.06,607.94 578,283 578,229 554,205 554,-1028 v1(575,-1049)
P1.13: U1.6
P1.14: U1.7
P1.15: U1.8
RESET: P4.4
SWDCLK: P4.6 U1.42 | length 1201
  Top Layer w10: v1(140,485) 140,642.63 172.37,675 540,675 572.94,707.94 U1.42
  Bottom Layer w10: P4.6 20,250 140,370 v1(140,485)
SWDIO: P4.5 U1.41 | length 1433.8
  Top Layer w10: v1(-320,250) -320,280 P4.5 ; v1(165,455) 165,640 182.94,657.94 U1.41
  Bottom Layer w10: v1(-320,250) -320,225 -295,200 -185,200 -155,230 25,230 165,370 v1(165,455)
SWO: P4.7
VBUS: C3.2 C4.2 F1.2 P5.5 P5.7 U1.26 U2.7 U2.8 | length 3883
  Top Layer w10: 226.06,-440 228.03,-441.97 U2.8 ; U1.26 450,-28 477,-55 640,-55 675,-90 675,-475 v1(770,-570) ; v1(770,-695) 870,-695 875,-700
  Top Layer w15: C3.2@269.98,-581.02 v2(270.96,-582)
  Top Layer w20: U2.7@226.06,-404.42 226.06,-440 226.06,-466.06 269.98,-509.98 C4.2 C3.2@269.98,-581.02
  Top Layer w25: F1.2 -205,-1405 -150,-1350 60,-1350 v2(125,-1285) 263,-1285 288,-1260 811,-1260 850,-1221 850,-1140 970,-1020 970,-868 875,-773 P5.7 875,-700 P5.5
  Bottom Layer w10: v1(770,-695) v1(770,-570)
  Bottom Layer w25: v2(125,-1285) 125,-680 223,-582 v2(270.96,-582)
VBUS': D1.4 D2.4 F1.1 J1.1 J2.1 | length 746
  Top Layer w15: J2.1 -310.57,-1573.82 v2(-308.4,-1571.65) ; J1.1 -308.57,-1072.82 v2(-307.4,-1071.65)
  Bottom Layer w15: v2(-308.4,-1571.65) v2@-307.4,-1570.65
  Bottom Layer w30: v2@-307.4,-1570.65 v2(-307.4,-1406) v2(-307.4,-1071.65)
VDD_nRF: P4.3 Q3.3 Q5.3 U1.1 | length 1702.5
  Top Layer w10: P4.3 -160,640 v1(-110,640)
  Top Layer w25: U1.1 -2.94,807.94 50,755 v1(50,640.9) 50,510 165,395 165,300 v2(400,65) ; Q5.3 400.79,-180.79 510.79,-290.79 Q3.3
  Bottom Layer w10: v1(-110,640) -109.1,640.9 v1(50,640.9)
  Bottom Layer w25: v2(400,-140) v2(400,65)
VDD_SS: C6.2 R15.2 R16.2 R17.2 SB2.2 U3.1 | length 714.3
  Top Layer w10: SB2.2 480,-845 510,-875 C6.2 545,-910 579.41,-944.41 U3.1 683.62,-905.63 v1(775,-905.63) R15.2 ; v1(775,-1025) 779.37,-1029.37 R16.2@815.63,-1029.37 ; R17.2 R16.2@815.63,-1029.37 ; R16.2 R16.2@815.63,-1029.37
  Bottom Layer w10: v1(775,-1025) v1(775,-905.63)
VDD_SYS: C5.2 P1.2 P2.17 P2.19 P5.1 P5.3 Q1.2 Q2.2 Q3.2 Q4.2 Q6.2 R9.2 SB2.1 SW3.1 | length 3044.8
  Top Layer w10: v2(340,-845) SB2.1 ; SW3.1@400,-734.06 SW3.1@435.67,-734.06 ; R9.2 559,-517 560,-516 ; Q3.2 610,-261.81 C5.2
  Top Layer w20: 335,-734.06 340,-739.06 v2(340,-845)
  Top Layer w25: P1.2 249.06,-734.06 335,-734.06 SW3.1@400,-734.06 ; SW3.1@435.67,-734.06 565,-734.06 ; Q3.2 560,-311.81 560,-516 560,-729.06 565,-734.06 ; P2.17 P2.19 P5.1 P5.3 855,-550 670.94,-734.06 644.33,-734.06 565,-734.06
  Bottom Layer w20: v2(340,-845) 340,-895 399,-954 399,-1253 ; Q1.2 399.6,-1252.4 399,-1253 ; Q4.2 577.4,-1482.4 575,-1480 ; Q6.2 575,-1569.35 575,-1480 ; 399,-1253 399,-1337.19 Q2.2 552.4,-1387.4 575,-1410 575,-1480
VDD_SYS': C9.2 FB1.2 P1.1 SB3.1 | length 286.6
  Top Layer w10: SB3.1 100,-805 119.06,-824.06 C9.2
  Top Layer w22: C9.2 212.5,-855 215,-852.5 ; FB1.2 215,-852.5 ; P1.1 215,-852.5
pads on no net: J1.4 J2.4 U2.1 U2.2 U2.10 U2.12 U2.13 U2.14 U2.15 U2.16 U2.17 U2.18 U2.19 U2.20 U2.21 U2.22 U2.27 U2.28

## Polygon pours and split planes (outlines as drawn)
GND on Top Layer "Top Layer-GND" (solid, remove dead copper, pour order 0): -703.57,-1900 1129.39,-1900 1129.39,881.45 -703.57,881.45
GND on Bottom Layer "Bottom Layer-GND" (solid, remove dead copper, pour order 2): -715,-1960 1117.96,-1960 1117.96,895 -715,895

## Keep-outs
Keep-Out Layer:
  the board outline again, w10

## Other copper
Top Layer:
  pour cut-out: 288,-1235.42 153,-1235.42 153,-1278 288,-1278
  pour cut-out: 523.37,-480 523.37,-517 480,-517 480,-480
  pour cut-out: 435.82,200 500,200 555,145 535,125 430,125 425,130 425,200
  pour cut-out: 875,550 975,550 975,50 875,50
  pour cut-out: 650,786 686,750 685,749 685,704 650,739
  pour cut-out: -678.23,840 1057.99,840 1057.99,1175 -678.23,1175
  pour cut-out: 195,-25 260,-25 260,-60 195,-60
  pour cut-out: 601.02,-645.76 554.24,-645.76 554,-646 554,-592 601,-592
  pour cut-out: -550,250 -450,250 -450,150 -550,150
  pour cut-out: 125,-1230 175,-1230 175,-1280 125,-1280
  pour cut-out: 235,-1010 185,-1010 185,-925 235,-925
  pour cut-out: 875,-550 875,-650 805,-650 805,-595 850,-550
  pour cut-out: -101,-1489 -42,-1489 -22,-1469 -22,-1428 -51,-1428 -101,-1478
  pour cut-out: 153,-1489 203,-1489 203,-1454 153,-1454
  pour cut-out: -103,-1689 -45,-1689 -45,-1646 -44,-1645 -103,-1645
  pour cut-out: 144,-1641 205,-1641 205,-1682 144,-1682
Bottom Layer:
  pour cut-out: -450,213 -260,213 -260,308 -450,308
  pour cut-out: 225,-67 200,-67 200,-12 225,-12
  pour cut-out: -550,650 -450,650 -450,350 -550,350
  region net NetR10_2: 51,-1449 144,-1449 144,-1576 51,-1576
  pour cut-out: -658.54,840 1069.8,840 1069.8,1175 -658.54,1175
  pour cut-out: 605,-1365 605,-1420 520,-1420 520,-1365
  pour cut-out: 75,-1420 143,-1420 144,-1421 144,-1455

## Silkscreen, mask and mechanical layers (free items; w line width, h text height)
Top Overlay:
  lines w10: -140,-1145 -125,-1165 ; -140,-1120 -125,-1100 ; -110,-1145 -125,-1165 ; -110,-1120 -125,-1100 ; -125,-1165 -125,-1100
  text "I" at -545,830 h40
  text "II" at -425,830 h40
  text "I" at 880,830 h40
  text "II" at 1000,830 h40
  text "1" at -353.34,730 h40
  text "GT840A_01" at 150,730 h35
  text "1" at 746.66,725 h40
  text "2" at -360,631 h40
  text "G" at -153.34,630 h40
  text "2" at 740,625 h40
  text "VT" at -173.33,533 h40
  text "3" at -360,532 h40
  text "3" at 740,532 h40
  text "4" at -360,433 h40
  text "4" at 740,433 h40
  text "IO" at -170,335 h40
  text "5" at -360,334 h40
  text "5" at 740,334 h40
  text "6" at -360,235 h40
  text "CL" at -173.33,235 h40
  text "6" at 740,235 h40
  text "7" at -360,130 h40
  text "7" at 740,130 h40
  text "8" at 740,30 h40
  text "9" at 740,-69 h40
  text "10" at 723.34,-168 h40
  text "power" at 40,-595 h40
  text "led" at 55,-730 h40 r90
  text "MCU" at -585,-940 h40
  text "LDO" at -105,-1070 h40 r90
  text "BAT" at -105,-1290 h40 r90
  text "UART" at -350,-1765 h40
Bottom Overlay:
  drawing of 82 lines, arcs and shapes, not listed
  text "P3" at -10,920 h40
  text "P2" at 695,920 h40
  text "P4" at 265,880 h40
  text "I" at -110,825 h40
  text "II" at 60,825 h40
  text "I" at 595,825 h40
  text "II" at 765,825 h40
  text "1" at 440,740 h40
  text "GND" at -58.33,735 h40
  text "011" at 75.01,735 h40
  text "3V3IN" at 325,735 h40
  text "010" at 641.67,730 h40
  text "GND" at 795,730 h40
  text "2" at 446.66,639.67 h40
  text "109" at -61.66,635 h40
  text "012" at 85,635 h40
  text "GND" at 288.35,635 h40
  text "009" at 645,630 h40
  text "GND" at 795,630 h40
  text "3" at 446.66,539.33 h40
  text "008" at -58.33,535 h40
  text "108" at 85,535 h40
  text "VTref" at 321.67,535 h40
  text "024" at 645,530 h40
  text "025" at 795,530 h40
  text "4" at 446.66,439 h40
  text "006" at -58.33,435 h40
  text "007" at 88.34,435 h40
  text "N.C." at 295.01,435 h40
  text "022" at 645,430 h40
  text "023" at 795,430 h40
  text "5" at 446.66,338.67 h40
  text "004" at -58.33,335 h40
  text "005" at 88.34,335 h40
  text "SWDIO" at 325,335 h40
  text "020" at 645,330 h40
  text "021" at 788.34,330 h40
  text "6" at 446.66,238.33 h40
  text "031" at -64.99,235 h40
  text "030" at 88.34,235 h40
  text "SWCLK" at 328.33,235 h40
  text "016" at 641.67,230 h40
  text "019" at 791.67,230 h40
  text "7" at 446.66,138 h40
  text "026" at -58.33,135 h40
  text "027" at 88.34,135 h40
  text "N.C." at 295.01,135 h40
  text "014" at 641.67,130 h40
  text "017" at 791.67,130 h40
  text "8" at 446.66,37.67 h40
  text "013" at 641.67,30 h40
  text "015" at 791.67,30 h40
  text "9" at 446.66,-62.67 h40
  text "VDD" at 645,-70 h40
  text "GND" at 795,-70 h40
  text "10" at 485,-162 h40
  text "VDD" at 645,-170 h40
  text "GND" at 795,-170 h40
  text "VDD" at 645,-470 h40
  text "GND" at 795,-470 h40
  text "5" at -518,-515.01 h200 r270
  text "VDD" at 645,-570 h40
  text "GND" at 795,-570 h40
  text "5V" at 625.01,-670 h40
  text "GND" at 795,-670 h40
  text "5V" at 625.01,-770 h40
  text "GND" at 795,-770 h40
  text "nano development kit" at -137,-1193.85 h63 r270
  text "nRF52840" at -17,-1257 h160 r270
  text "SVTH: DO NGOC NHUAN" at 810,-1710 h40 r270
  text "GVHD: TS.VO QUE SON" at 887,-1710 h40 r270
Top Solder:
  region: -300,-71 cw(c-300.66,-425.15) 53.5,-424.5 cw(c-299.35,-425.15) -300,-778
  region: -300,-778 cw(c-290.93,-405.68) -611.3,-595.59 -611.3,-426.3 -611.3,-253.6 cw(c-195.27,-531.3) -472.97,-115.27 cw(c-275.48,-526.82) -300,-71
  lines w6: 229.61,-421.69 229.61,-438.43 246.34,-438.43 ; 229.61,-258.31 229.61,-241.57 246.34,-241.57 ; 409.72,-438.43 426.46,-438.43 426.46,-421.69 ; 409.72,-241.57 426.46,-241.57 426.46,-258.31
Mechanical 7:
  lines w6: -604,839 1171,839
Mechanical 28:
  lines w0.5: -1181.1,-2066.93 1574.8,-2066.93 1574.8,1476.38 -1181.1,1476.38 -1181.1,-2066.93
Mechanical 29:
  lines w0.5: -885.83,-2066.93 1279.53,-2066.93 1279.53,1476.38 -885.83,1476.38 -885.83,-2066.93
Mechanical 30:
  circle w0.5: c-475,1050 r59.45
  circle w0.5: c900,1050 r59.45
Mechanical 31:
  circle w0.5: c-475,1050 r59.45
  circle w0.5: c900,1050 r59.45

## Text inside footprints (layer, text, board x,y; h text height)
U1: Mechanical 7 "ANTEN AREA" at 57.01,984.6 h45